# EAGLE board power_injector_rev_b (EAGLE 6.6.0)
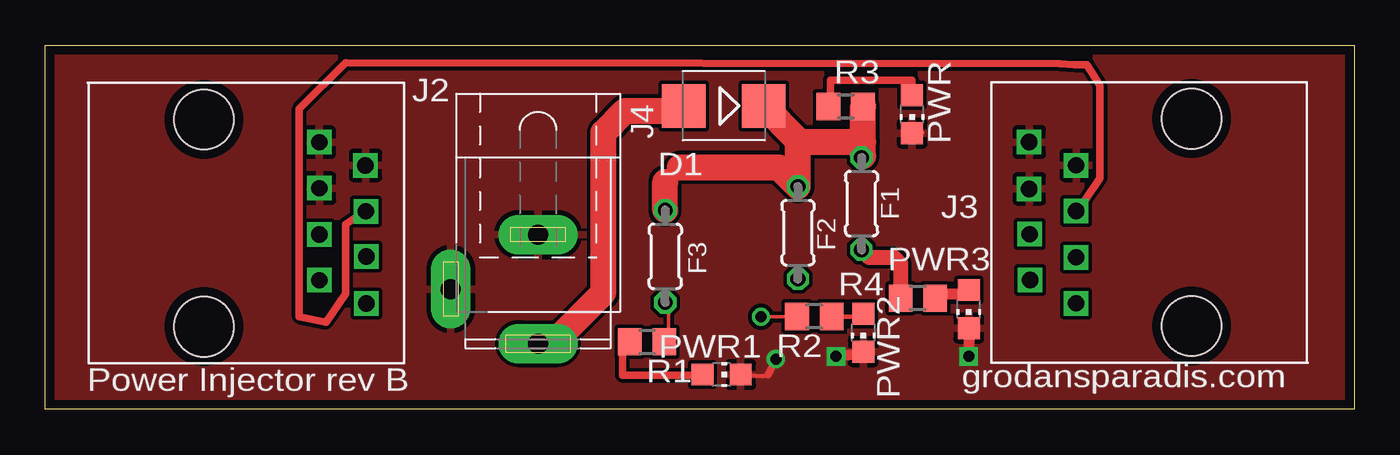
[diagram p0: board, top side]
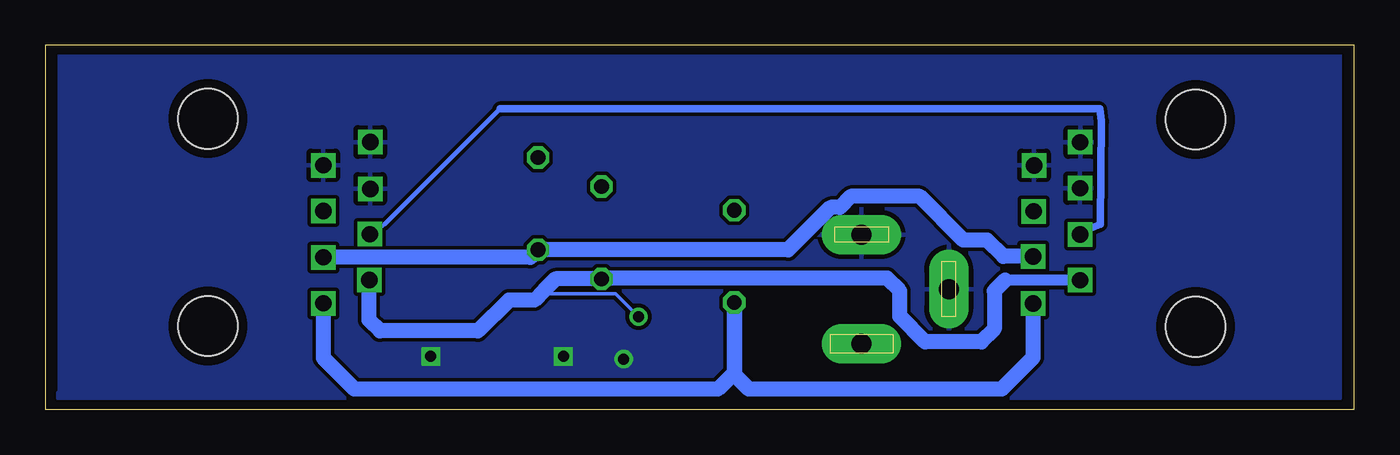
[diagram p1: board, bottom side, seen from below]

Size 72 x 20 mm. Coordinates in mm from the lower left corner, seen from the top.
Outline: 0,0 0,20 72,20 72,0 0,0
Copper layers (1*16): Top 0.035mm / dielectric 1.5mm / Bottom 0.035mm
Design rules "8mils": minimum track width 8mil, minimum drill 0.6mm, track to track 8mil, track to pad 8mil, pad to pad 8mil, via to via 8mil, smd to smd 0mil, copper to edge 20mil, drill to drill 10mil, minimum pad ring 8mil, minimum via ring 8mil, stop-mask expansion 0mil, vias tented up to drill 0mil, thermal gap 10mil

## Footprints (pad centres in the part's own frame; a part is rotated, then mirrored left to right if it is on the bottom)
SMB = smd 2.4 x 2.4: A 2.2,0; C -2.2,0
0204/5 = drill 0.813 octagon: 1 -2.54,0; 2 2.54,0
RJ-45 = drill 0.9 square: 1 -4.45,6.35; 2 -3.17,8.89; 3 -1.92,6.36; 4 -0.65,8.91; 5 0.62,6.35; 6 1.84,8.93; 7 3.14,6.35; 8 4.42,8.93 | hole 3.3: -5.7,0; 5.7,0
SPC4077 = drill 1.1 pad 2.184 long: 1 -3,0; 2 0,-4.8; 3 3,0
CHIP-LED0805 = smd 1.2 x 1.2: A 0,-1.05; C 0,1.05
R0805 = smd 1.3 x 1.5: 1 -0.95,0; 2 0.95,0

## Placement (x,y rotation side)
D1  S1D  [SMB]  37.32,16.68 180 top
F1  MF-R050  [0204/5]  44.9,11.3 270 top
F2  MF-R050  [0204/5]  41.4,9.7 270 top
F3  MF-R050  [0204/5]  34.1,8.4 270 top
J2  A00-108-220-450  [RJ-45]  8.72,10.23 270 top
J3  A00-108-220-450  [RJ-45]  63.06,10.27 90 top
J4  [SPC4077]  27.1,6.6 270 top
LED1  [CHIP-LED0805]  47.68,16.22 180 top
LED2  [CHIP-LED0805]  37.2,1.9 270 top
LED3  [CHIP-LED0805]  45,4.2 180 top
LED4  [CHIP-LED0805]  50.8,5.5 180 top
R1  4k7  [R0805]  33.1,3.7 0 top
R2  4k7  [R0805]  42.3,5.1 180 top
R3  4k7  [R0805]  44.03,16.65 0 top
R4  4k7  [R0805]  48,6.1 180 top

## Library data of the parts
D1 = diode
F1-F3 R1-R4 = rcl
J2 J3 = vscpcan
J4 = con-jack-special; OC_FARNELL: unknown; OC_NEWARK: unknown
LED1-LED4 = led

## Nets
+12V: D1.C F1.1 F2.1 F3.1 R3.2
GND: J2.1 J2.2 J2.3 J3.6 J3.7 J3.8 J4.1 J4.2 LED1.C LED2.C LED3.C LED4.C
N$1: LED3.A R2.1
N$2: LED1.A R3.1
N$4: J2.5 J3.4
N$5: J2.4 J3.5
N$6: LED4.A R4.1
N$7: LED2.A R1.1
N$8: D1.A J4.3
PWR1: F3.2 J2.8 J3.1 R1.2
PWR2: F2.2 J2.7 J3.2 R2.2
PWR3: F1.2 J2.6 J3.3 R4.2

## Tracks (layer width: path | path; a pad name or v marks a point on that pad's centre or on a via)
+12V
  Top 0.813: 34.1,12.5 34.9,13.3 | 44.98,13.92 F1.1 44.9,14.6 45,14.7 | 41.4,14.8 41.5,14.7
  Top 1.422: F3.1 34.1,12.5 | 34.9,13.3 40.34,13.3 F2.1 41.4,14.8 D1.C | 44.98,13.92 R3.2 | 41.5,14.7 45,14.7
GND  (via drill 0.6, 0.61)
  Top 0.254: LED1.C 48.26,15.24 | 39.76,1.88 39.46,1.81 LED2.C
  Top 0.406: 39.76,1.88 v40.19,2.75
  Top 0.61: v43.5,2.9 44.55,3 LED3.C | LED4.C v50.8,2.9
  pour Bottom: 0.6,19.6 0.8,19.6 0.8,0.6 71.3,0.6 71.3,0.9 71.2,0.9 71.2,19.7 0.9,19.7
  pour Top: 0.4,19.9 0.4,0.4 0.6,0.2 71.2,0.2 71.8,0.8 71.8,19.4 71.2,20
N$1
  Top 0.254: LED3.A 44.45,5.08 43.18,5.08 R2.1
N$2
  Top 0.254: R3.1 43.18,16.51
  Top 0.406: 43.18,16.51 43.18,18.08 47.66,18.08 LED1.A
N$4
  Bottom 0.254: 46.99,16.51 53.34,10.16 54.01,9.66 J3.4
  Bottom 0.406: 46.99,16.51 14,16.51 13.9,15.83 13.97,10.16 15.14,9.66 J2.5
N$5
  Top 0.406: J2.4 17.68,10.93 16.51,10.16 16.51,6.35 15.44,4.78 13.97,5.08 13.97,16.51 16.51,19.05 55.8,19 56.6,18.95 57.3,18.95 58,17.8 58.02,12.7 57.15,11.43 J3.5
N$6
  Top 0.254: 50.8,6.35 LED4.A | R4.1 49.53,6.35
  Top 0.61: 49.53,6.35 50.8,6.35
N$7
  Top 0.254: 35.56,1.87 LED2.A | 31.75,3.81 R1.1
  Top 0.406: 35.56,1.87 31.75,1.87 31.75,3.81
N$8
  Top 1.422: J4.3 27.9,3.6 30.7,6.4 30.7,15.2 31.9,16.4 34.84,16.4 D1.A
PWR1
  Top 0.203: R1.2 34.29,3.81 34.29,6.35 F3.2
  Bottom 0.813: J2.8 17.65,2.85 19.4,1.1 33.3,1.1 34.1,1.9 F3.2 34.1,2 35,1.1 55,1.1 56.7,2.8 J3.1
PWR2  (via drill 0.6)
  Top 0.203: v39.37,5.08 41.91,5.08 R2.2
  Bottom 0.203: v39.37,5.08 40.64,6.35 44.45,6.35 44.6,6.5
  Bottom 0.61: J2.7 19.21,7.09
  Bottom 0.813: J3.2 54.2,7.07 54.2,4.9 53.6,4.3 48.2,4.3 46.5,6 45.1,6 44.6,6.5 43.94,7.16 F2.2 41.36,7.2 25.7,7.2 25,6.5 25,5.1 23.6,3.7 20.5,3.7 19.8,4.4 19.8,6.5 19.21,7.09
PWR3
  Top 0.813: R4.2 47.05,8 46.7,8.35 45.31,8.35 F1.2
  Bottom 0.813: J2.6 19.3,8.4 20.2,9.3 21.5,9.3 23.9,11.7 27.7,11.7 28.3,11.1 28.8,11.1 31.14,8.76 F1.2 45.31,8.35 J3.3

## Text on the board
tNames: PWR | PWR3 | PWR1 | Power Injector rev B | PWR2 | grodansparadis.com